# Altium PCB Solar Battery Charger PCB.PcbDoc (part 2 of 2)
Units mm, origin at the board's own origin, x right, y up, seen from the top; angles counter-clockwise.
Board outline 113.77 x 60.65 mm, 4 copper layers (Top Layer, Int1 (GND), Int2 (PWR), Bottom Layer), stack 1.586 mm thick; 88 components, 58 nets, 240 pads, 94 vias.
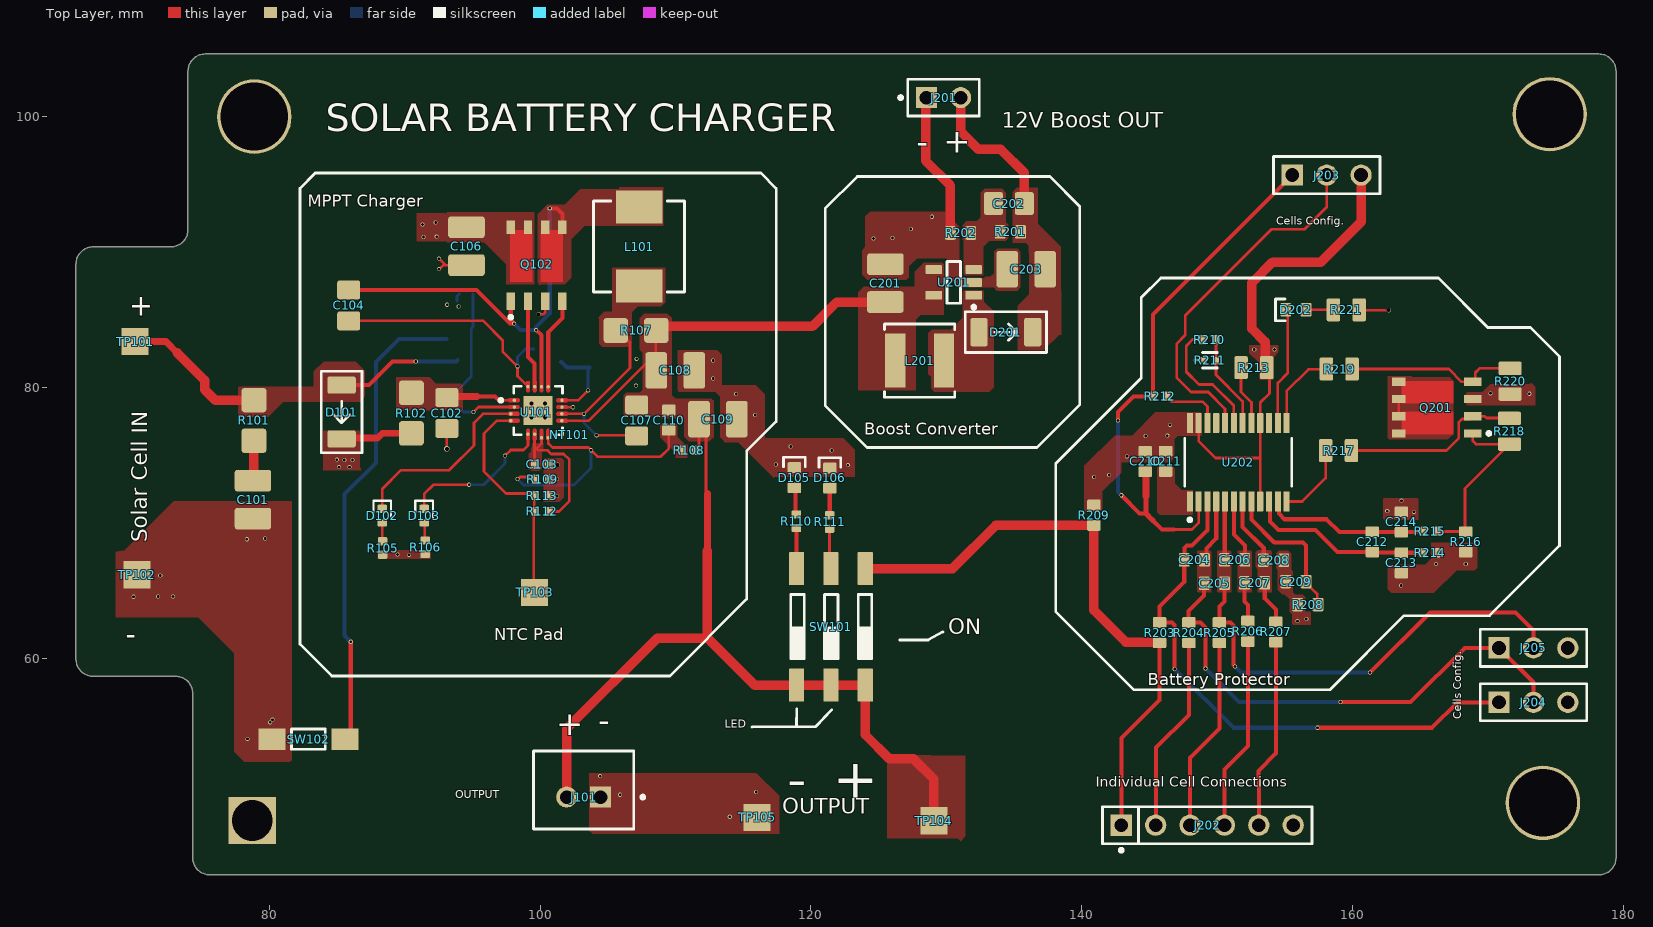
[diagram p0: Top Layer view]

## Silkscreen, mask and mechanical layers (free items; w line width, h text height) (continued)
Top Overlay: (continued)
  text "OUTPUT" at 117.863,48.113 h2
Bottom Overlay:
  text "By Pranay Desamsetti" at 167.72,49.958 h2
Mechanical 1:
  lines w0.2: 167.825,83.05 cw(c167.825,82.925) 167.95,82.925 167.95,78.675 ccw(c168.075,78.675) 168.075,78.55 169.725,78.55 ccw(c169.725,78.6) 169.775,78.6
  lines w0.7: 65.7,59.945 ccw(c66.97,59.945) 66.97,58.675 73.055,58.675 cw(c73.055,57.405) 74.325,57.405 74.325,45.27 ccw(c75.595,45.27) 75.595,44 77.745,44 178.205,44 ccw(c178.205,45.27) 179.475,45.27 179.475,103.38 ccw(c178.205,103.38) 178.205,104.65 79.77,104.65 75.245,104.65 ccw(c75.245,103.38) 73.975,103.38 73.975,91.67 cw(c72.705,91.67) 72.705,90.4 66.97,90.4 ccw(c66.97,89.13) 65.7,89.13 65.7,59.945

## Text inside footprints (layer, text, board x,y; h text height)
D102: Mechanical 13 "+" at 87.817,68.667 h0.5 r90
D103: Mechanical 13 "+" at 90.917,68.667 h0.5 r90
D105: Mechanical 13 "+" at 119.383,72.033 h0.5 r270
D106: Mechanical 13 "+" at 122.008,72.008 h0.5 r270
D202: Mechanical 13 "+" at 157.142,86.358 h0.5
SW101: Top Overlay "ON" at 130.148,61.375 h2